# Altium PCB PCB1.pcbdoc
Units mil, origin at the board's own origin, x right, y up, seen from the top; angles counter-clockwise.
Board outline 8775.19 x 3933.2 mil, 6 copper layers (Top Layer, Inner1, Inner2, Inner3, Inner4, Bottom Layer); 113 components, 65 nets, 374 pads, 254 vias.
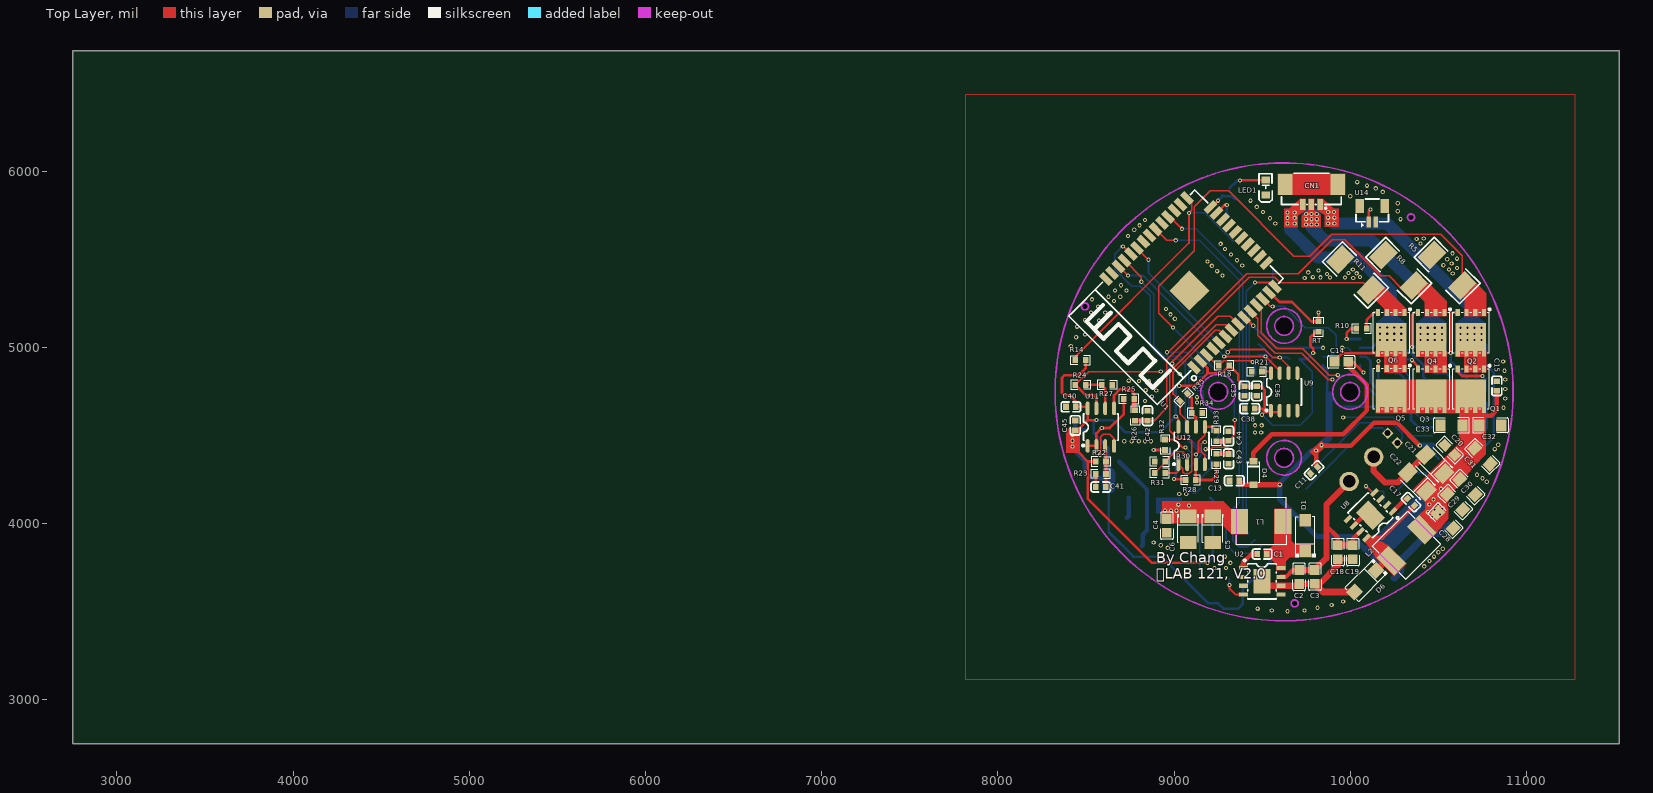
[diagram p0: Top Layer view]
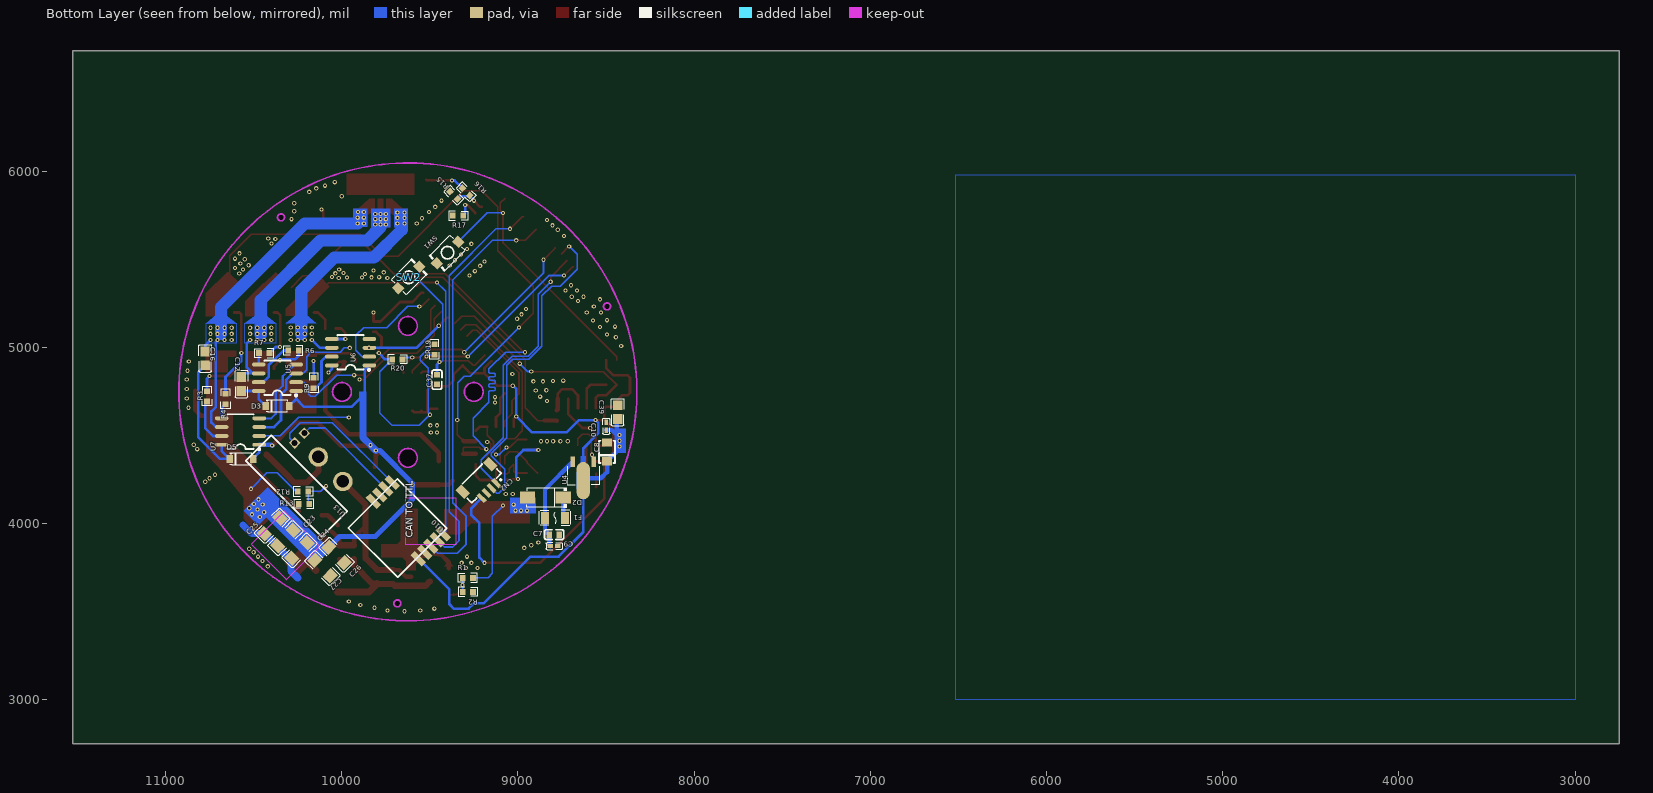
[diagram p1: Bottom Layer view, seen from below]
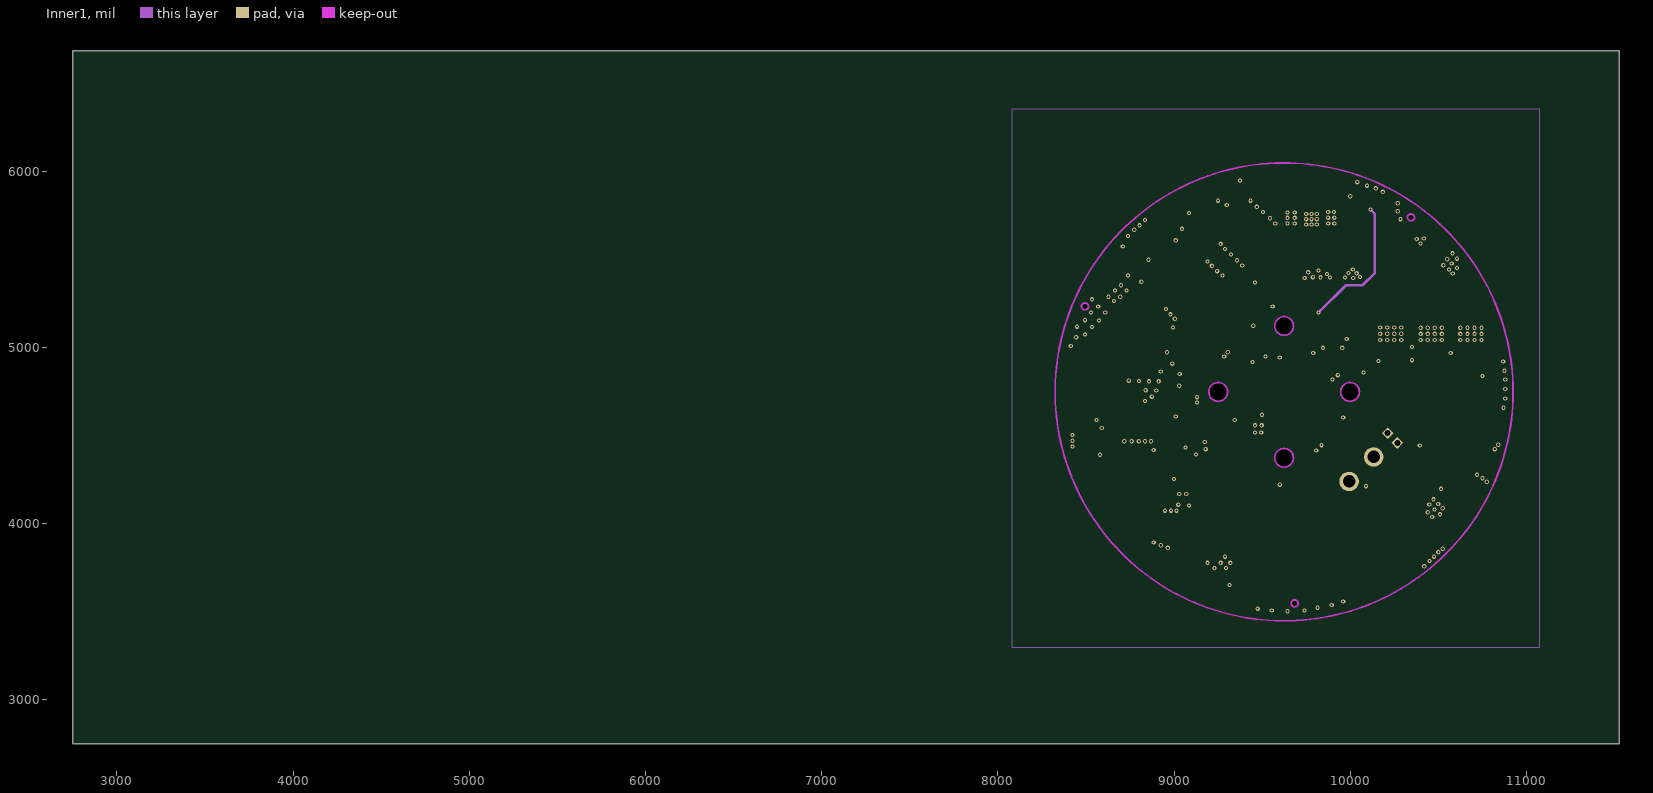
[diagram p2: Inner1]
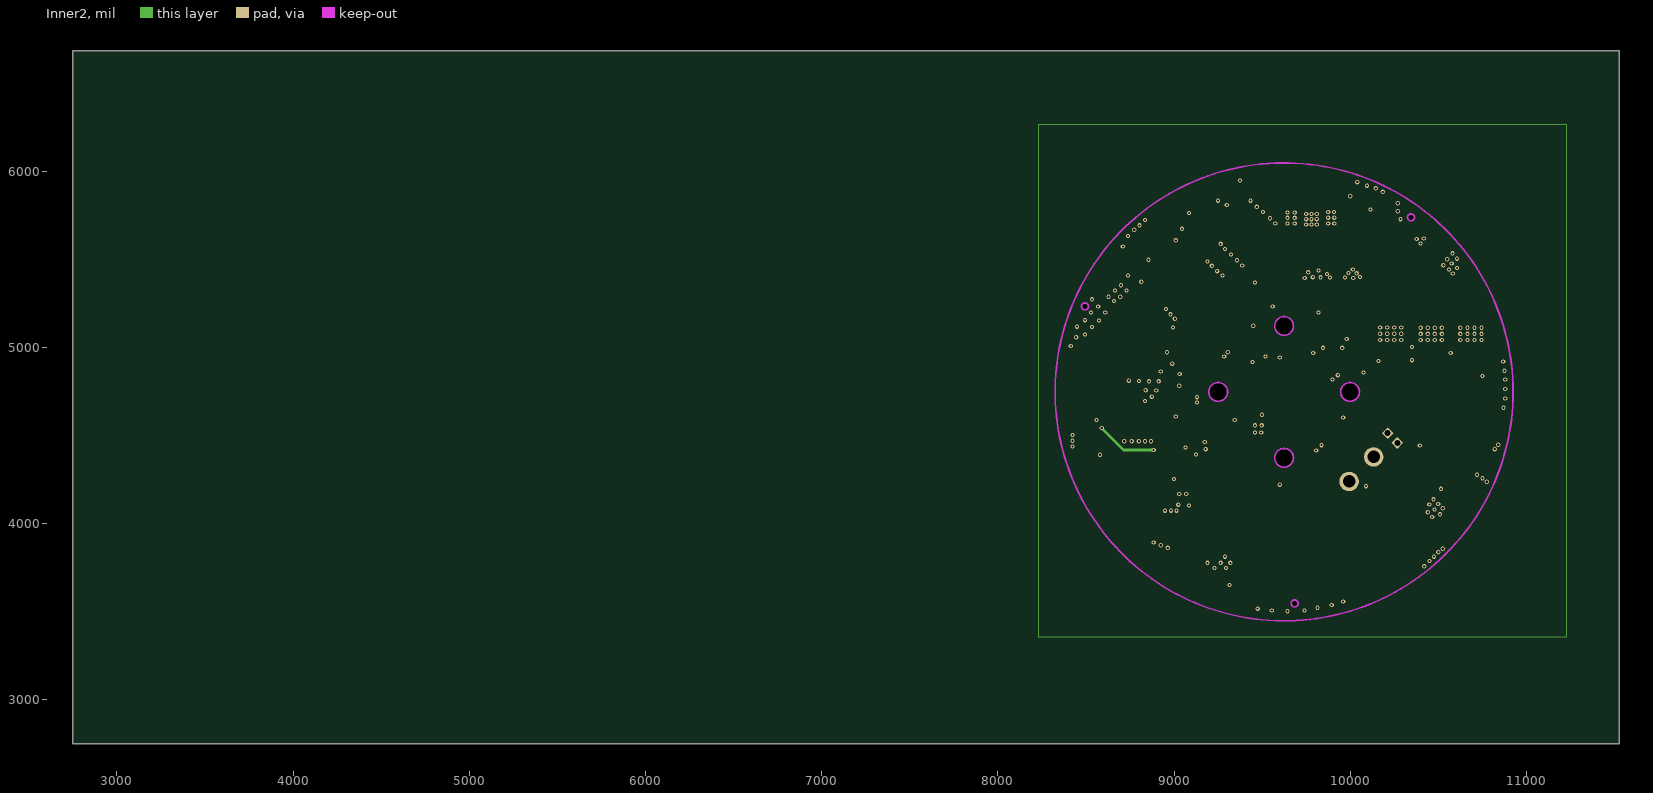
[diagram p3: Inner2]
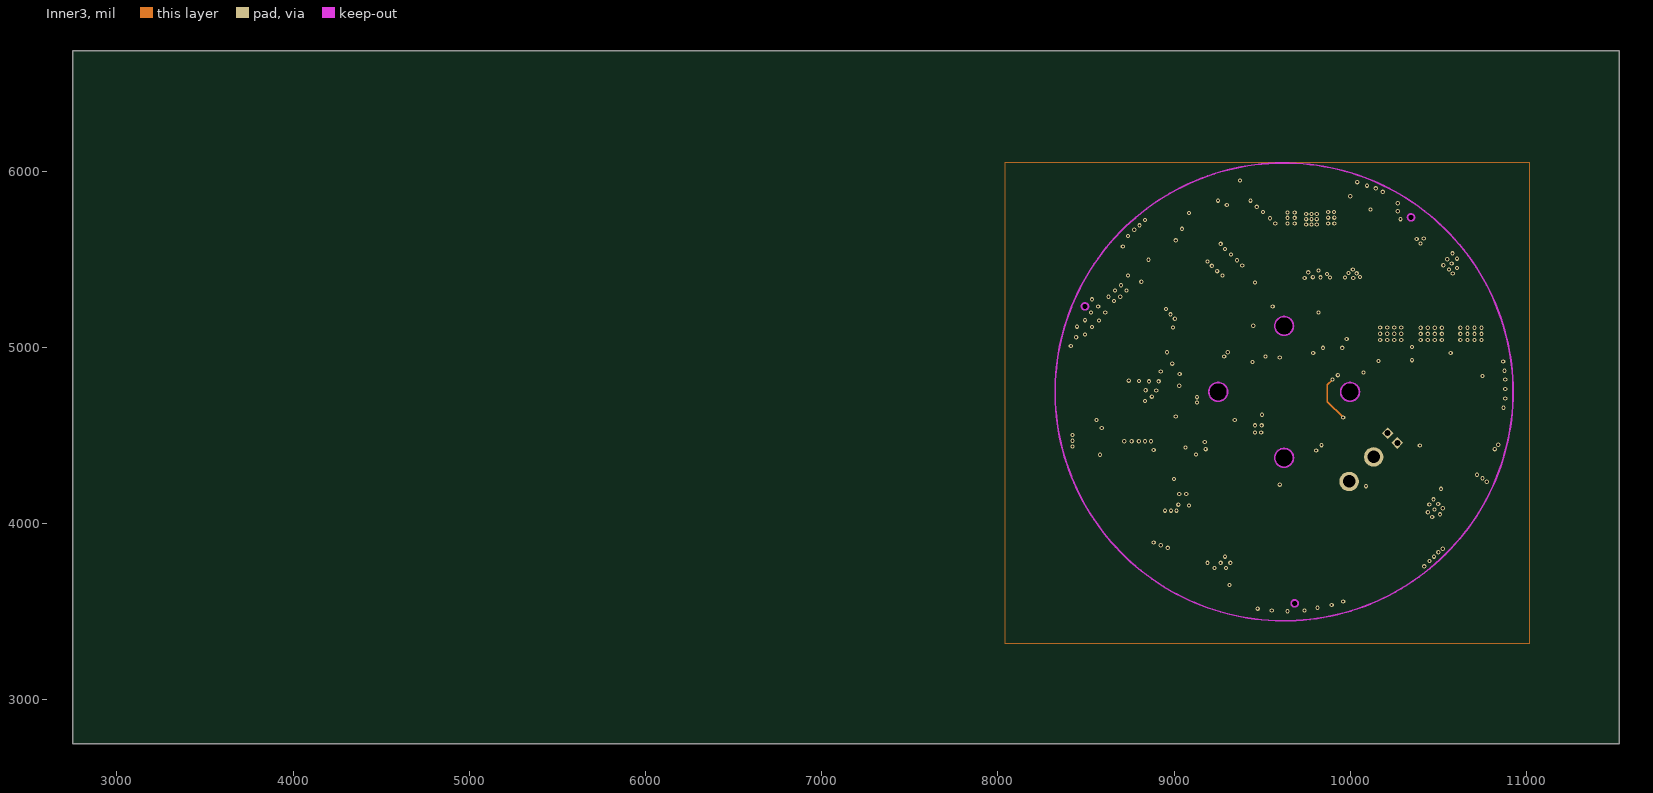
[diagram p4: Inner3]
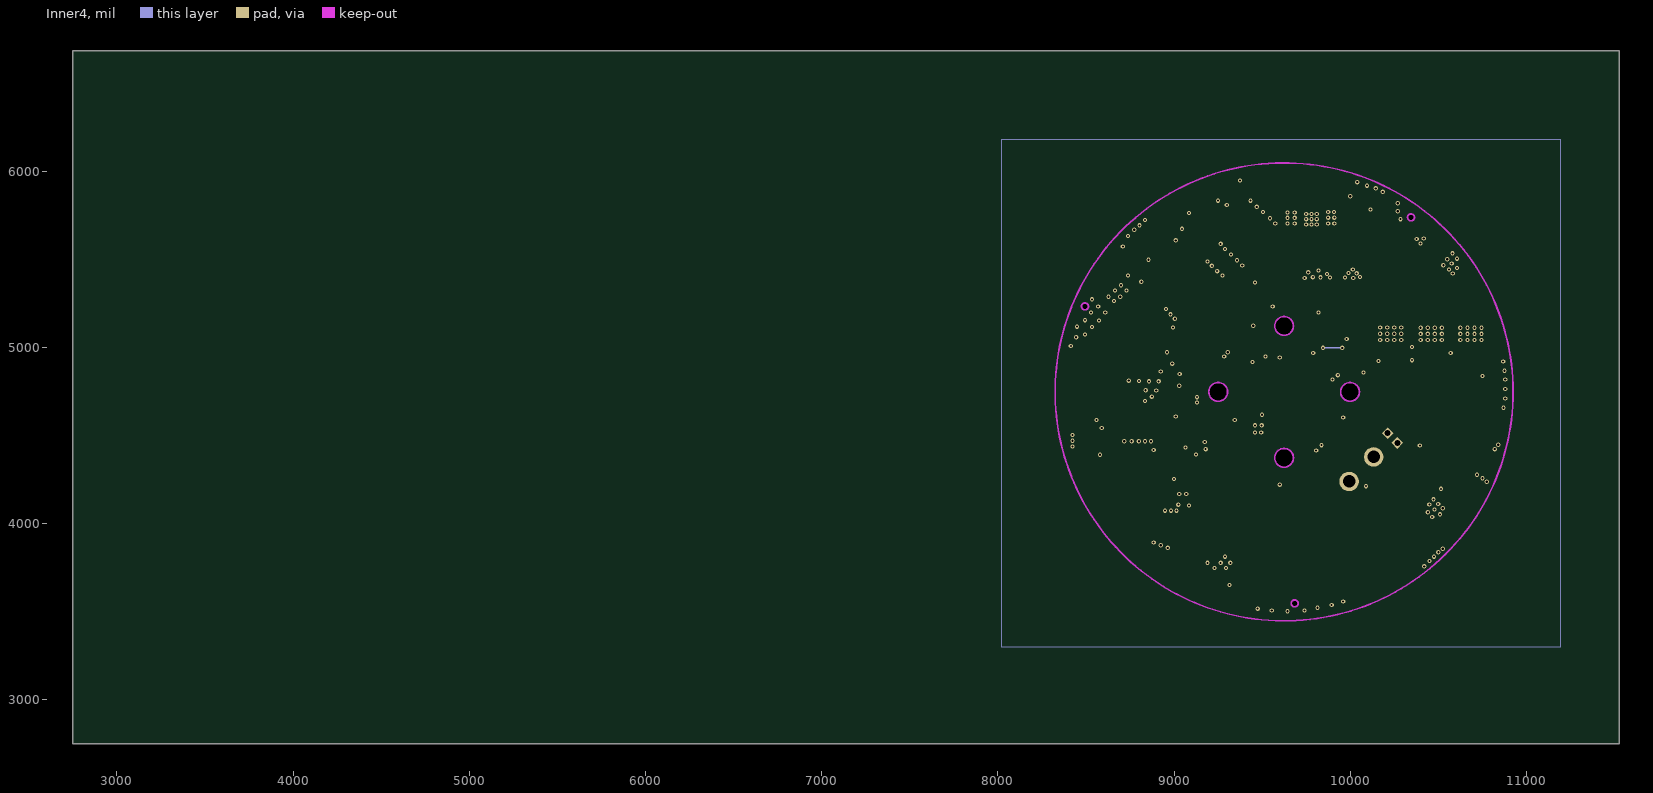
[diagram p5: Inner4]

## Layer stack, top to bottom
Top Layer: signal copper (thickness not stored)
Dielectric: dielectric 12.6, FR-4, Dk 4.8
Inner1: signal copper (thickness not stored)
Dielectric: dielectric 12.6, FR-4, Dk 4.8
Inner2: signal copper (thickness not stored)
Dielectric: dielectric 12.6, FR-4, Dk 4.8
Inner3: signal copper (thickness not stored)
Dielectric: dielectric 12.6, FR-4, Dk 4.8
Inner4: signal copper (thickness not stored)
Dielectric: dielectric 12.6, FR-4, Dk 4.8
Bottom Layer: signal copper (thickness not stored)

## Board outline
11525.19,2750 2750,2750 2750,6683.2 11525.19,6683.2
cut-out: 9676.57,5121.5 ccw(c9623.42,5121.5) 9570.27,5121.5 ccw(c9623.42,5121.5)
cut-out: 10050.59,4747.49 ccw(c9997.44,4747.34) 9944.29,4747.49 ccw(c9997.44,4747.63)
cut-out: 9676.57,4373.47 ccw(c9623.42,4373.47) 9570.27,4373.47 ccw(c9623.42,4373.47)
cut-out: 9302.56,4747.49 ccw(c9249.41,4747.34) 9196.26,4747.49 ccw(c9249.41,4747.63)
cut-out: 10363.11,5737.49 ccw(c10343.42,5737.35) 10323.74,5737.49 ccw(c10343.42,5737.62)
cut-out: 9703.11,3547.49 ccw(c9683.42,3547.35) 9663.74,3547.49 ccw(c9683.42,3547.62)
cut-out: 8513.11,5232.49 ccw(c8493.42,5232.35) 8473.74,5232.49 ccw(c8493.42,5232.62)

## Components (designator, comment, footprint, x,y, rotation, side; value= is the part's Value field where it differs from the comment)
C1 "CC0603KRX7R9BB103" C0603 9498.42,3827.49 r180 top
C2 "GRM21BR61H106KE43L" C0805 9708.42,3697.49 r90 top
C3 "GRM21BR61H106KE43L" C0805 9797.79,3698.12 r90 top
C4 "GRM21BR61H106KE43L" C0805 8958.42,3987.49 r90 top
C5 "CA45-B-16V-47uF-K" CAP-SMD_L3.5-W2.8-R-RD 9218.42,3967.49 r90 top
C6 "CA45-B-16V-47uF-K" CAP-SMD_L3.5-W2.8-R-RD 9078.42,3967.49 r90 top
C7 "CL10A226MO7JZNC" C0603 8793.42,3937.49 r180 bottom
C8 "CA45-A-16V-22uF-K" CAP-SMD_L3.2-W1.6 8493.42,4407.49 r90 bottom
C9 "CL05B104KB54PNC" C0402 8793.42,3872.49 r0 bottom
C10 "CL05B104KB54PNC" C0402 8498.42,4552.49 r270 bottom
C11 "0603B104K500NT" C0603 9793.42,4302.49 r45 top
C12 "GRM21BR61H106KE43L" C0805 10568.42,4792.49 r270 bottom
C13 "0603B104K500NT" C0603 9341.02,4243.51 r0 top
C14 "GRM21BR61H106KE43L" C0805 9948.42,4917.49 r0 top
C15 "0603B104K500NT" C0603 10830.38,4781.18 r270 top
C16 "GRM21BR61H106KE43L" C0805 10773.42,4937.49 r270 bottom
C17 "CC0603KRX7R9BB103" C0603 10343.42,4122.49 r135 top
C18 "GRM21BR61H106KE43L" C0805 9928.42,3837.49 r90 top
C19 "GRM21BR61H106KE43L" C0805 10013.42,3837.49 r90 top
C20 "GRM21BR61H106KE43L" C0805 10563.42,4417.49 r315 top
C21 "CA45-B-16V-47uF-K" CAP-SMD_L3.5-W2.8-R-RD 10478.42,4337.49 r315 top
C22 "CA45-B-16V-47uF-K" CAP-SMD_L3.5-W2.8-R-RD 10378.42,4237.49 r315 top
C23 "CL31A226KAHNNNE" C1206 10318.42,3917.49 r135 bottom
C24 "CL31A226KAHNNNE" C1206 10238.42,3847.49 r135 bottom
C25 "CL31A226KAHNNNE" C1206 10393.42,3987.49 r135 bottom
C26 "CL31A226KAHNNNE" C1206 10028.42,3822.49 r45 bottom
C27 "CL31A226KAHNNNE" C1206 10108.42,3747.49 r45 bottom
C28 "CL31A226KAHNNNE" C1206 10538.42,4017.49 r135 top
C29 "CL31A226KAHNNNE" C1206 10593.42,4122.49 r135 top
C30 "CL31A226KAHNNNE" C1206 10663.42,4207.49 r135 top
C31 "CL31A226KAHNNNE" C1206 10748.42,4382.49 r135 top
C32 "CL31A226KAHNNNE" C1206 10793.42,4557.49 r180 top
C33 "CL31A226KAHNNNE" C1206 10573.42,4557.49 r0 top
C35 "0603B104K500NT" C0603 9398.42,4752.49 r270 top
C36 "0603B104K500NT" C0603 9468.42,4752.49 r270 top
C37 "0603B104K500NT" C0603 9458.42,4817.49 r90 bottom
C38 "CC0603KRX7R9BB104" C0603 9428.42,4652.49 r0 top
C39 "GRM21BR61H106KE43L" C0805 8433.42,4632.49 r270 bottom
C40 "0603B104K500NT" C0603 8413.3,4662.49 r180 top
C41 "0603B104K500NT" C0603 8583.42,4207.49 r0 top
C42 "0603B222K500NT" C0603 8848.42,4612.49 r90 top
C43 "0603B222K500NT" C0603 9308.42,4367.49 r270 top
C44 "0603B222K500NT" C0603 9308.42,4497.49 r90 top
C45 "0603B104K500NT" C0603 8438.42,4557.49 r90 top
CN1 "YTC-A1251-03ABW" CONN-SMD_3P-P1.25_YTC-A1251-03ABW 9778.42,5867.49 r180 top
CN2 "YTC-A1001LF-04A" CONN-TH_YTC-A1001LF-04A 9198.42,4222.49 r315 bottom
D1 "B340A-13-F" SMA_L4.4-W2.6-LS5.0-RD 9743.42,3932.49 r90 top
D2 "SS14_C2480" SMA_L4.2-W2.6-LS5.3-RD 8843.42,4147.49 r0 bottom
D3 "FR107_C511885" SOD-123_L2.8-W1.8-LS3.7-RD 10363.42,4667.49 r180 bottom
D4 "FR107_C511885" SOD-123_L2.8-W1.8-LS3.7-RD 9448.42,4287.49 r270 top
D5 "FR107_C511885" SOD-123_L2.8-W1.8-LS3.7-RD 10568.42,4367.49 r180 bottom
D6 "B340A-13-F" SMA_L4.4-W2.6-LS5.0-RD 10083.42,3672.49 r225 top
F1 "BSMD1206-100-24V" F1206 8788.42,4032.49 r0 bottom
L1 "FXL0630-220-M" IND-SMD_L7.0-W6.6_FXL0630 9493.42,4012.49 r180 top
L2 "FXL0630-220-M" IND-SMD_L7.0-W6.6_FXL0630 10318.42,3877.49 r45 top
LED1 "XL-2012UGC" LED0805-RD_GREEN 9518.42,5907.49 r90 top
Q1 "HYG025N06LS1C2" DFN-8_L5.9-W5.2-P1.27-LS6.2-BL 10683.38,4762.78 r180 top
Q2 "HYG025N06LS1C2" DFN-8_L5.9-W5.2-P1.27-LS6.2-BL 10683.38,5082.78 r180 top
Q3 "HYG025N06LS1C2" DFN-8_L5.9-W5.2-P1.27-LS6.2-BL 10458.38,4762.78 r180 top
Q4 "HYG025N06LS1C2" DFN-8_L5.9-W5.2-P1.27-LS6.2-BL 10458.38,5082.78 r180 top
Q5 "HYG025N06LS1C2" DFN-8_L5.9-W5.2-P1.27-LS6.2-BL 10230.96,4764.1 r180 top
Q6 "HYG025N06LS1C2" DFN-8_L5.9-W5.2-P1.27-LS6.2-BL 10230.96,5082.62 r180 top
R1 "0603WAF2002T5E" R0603 9283.42,3692.49 r180 bottom
R2 "Res_0603" R0603 9283.42,3612.49 r0 bottom
R3 "0603WAF220JT5E" R0603 10763.42,4722.49 r90 bottom
R4 "0603WAF220JT5E" R0603 10658.42,4707.49 r90 bottom
R5 "RLP25FEGMR005" RES-SMD_L6.4-W3.2-1 10548.42,5437.49 r315 top
R6 "0603WAF220JT5E" R0603 10273.42,4982.49 r180 bottom
R7 "0603WAF220JT5E" R0603 10438.42,4967.49 r180 bottom
R8 "RLP25FEGMR005" RES-SMD_L6.4-W3.2-1 10273.42,5437.49 r315 top
R9 "0603WAF220JT5E" R0603 10158.42,4797.49 r90 bottom
R10 "0603WAF220JT5E" R0603 10063.42,5107.49 r0 top
R11 "RLP25FEGMR005" RES-SMD_L6.4-W3.2-1 10028.42,5412.49 r315 top
R12 "0603WAF2002T5E" R0603 10218.42,4182.49 r0 bottom
R13 "Res_0603" R0603 10213.42,4112.49 r180 bottom
R14 "0603WAF1002T5E" R0603 8468.42,4927.49 r0 top
R15 "0603WAF1002T5E" R0603 9363.42,5862.49 r45 bottom
R16 "0603WAF3301T5E" R0603 9293.42,5882.49 r45 bottom
R17 "0603WAF1002T5E" R0603 9338.42,5747.49 r0 bottom
R18 "0603WAF1002T5E" R0603 9283.36,4897.57 r0 top
R19 "0603WAF4701T5E" R0603 9473.76,4987.83 r90 bottom
R20 "0603WAF4701T5E" R0603 9683.42,4932.49 r0 bottom
R21 "0603WAF1002T5E" R0603 9468.42,4862.49 r0 top
R22 "0603WAF2002T5E" R0603 8583.42,4352.49 r180 top
R23 "0603WAF2002T5E" R0603 8583.42,4282.49 r0 top
R24 "0603WAF2002T5E" R0603 8468.42,4787.49 r180 top
R25 "0603WAF2002T5E" R0603 8743.42,4707.49 r0 top
R26 "0603WAF2001T5E" R0603 8778.42,4612.49 r90 top
R27 "0603WAF2001T5E" R0603 8618.42,4787.49 r180 top
R28 "0603WAF2002T5E" R0603 9093.42,4247.49 r0 top
R29 "0603WAF2001T5E" R0603 9238.42,4367.49 r270 top
R30 "0603WAF2001T5E" R0603 8918.42,4352.49 r0 top
R31 "0603WAF2002T5E" R0603 8918.42,4287.49 r0 top
R32 "0603WAF2002T5E" R0603 8948.42,4447.49 r90 top
R33 "0603WAF2001T5E" R0603 9238.42,4497.49 r90 top
R34 "0603WAF2001T5E" R0603 9128.42,4627.49 r180 top
R35 "0603WAF2002T5E" R0603 9053.42,4717.49 r225 top
RT "Res_0603" R0603 9818.42,5117.49 r270 top
SW1 "TS-1088-AR02016" SW-SMD_L3.9-W3.0-P4.45 9398.42,5537.49 r315 bottom
SW2 "TS-1088-AR02016" SW-SMD_L3.9-W3.0-P4.45 9618.42,5397.49 r135 bottom
U1 "ESP32-WROOM-32-N4" WIFIM-SMD_ESP32-WROOM-32-N4 9113.42,5387.49 r135 top
U2 "TPS5430DDAR" ESOP-8_L4.9-W3.9-P1.27-LS6.0-TL-EP 9498.42,3672.49 r0 top
U4 "CJA1117B-3.3" SOT-89-3_L4.5-W2.5-P1.50-LS4.2-BR 8628.42,4297.49 r90 bottom
U5 "EG2104S" SOIC-8_L5.0-W4.0-P1.27-LS6.0-BL 10363.42,4827.49 r90 bottom
U6 "EG2104S" SOIC-8_L5.0-W4.0-P1.27-LS6.0-BL 9948.42,4972.49 r90 bottom
U7 "EG2104S" SOIC-8_L5.0-W4.0-P1.27-LS6.0-BL 10573.42,4522.49 r90 bottom
U8 "TPS5430DDAR" ESOP-8_L4.9-W3.9-P1.27-LS6.0-TL-EP 10113.42,4047.49 r225 top
U9 "AS5600-ASOT" SOIC-8_L5.0-W4.0-P1.27-LS6.0-BL 9623.42,4747.49 r0 top
U10 "CAN-Niren-V2" CAN-Niren-V2 9638.42,4017.49 r45 bottom
U11 "LM358DR" SOIC-8_L5.0-W4.0-P1.27-LS6.0-BL 8583.42,4547.49 r0 top
U12 "LM358DR" SOIC-8_L5.0-W4.0-P1.27-LS6.0-BL 9098.42,4442.49 r0 top
U13 "XT30PB(2+2)-M" XT30PB(2+2)-M 9992.35,4239 r45 bottom
U14 "XY-SH1.0-2A51" CONN-SMD_2P-P1.00_XY-SH1.0-2A51 10123.42,5757.49 r0 top

## Footprints (in the part's own frame and the unit in brackets; to place one, negate y for a bottom-side part, rotate by r counter-clockwise, add the part's x,y. Pads: shape width x height; smd on the part's side, far side on the other; paste and mask are expansions set on the pad)
C0402 [mm]
  rect 0.79x0.54 smd: 1(-0.545,0) 2(0.545,0)
  silkscreen extent -1.17,-0.5 1.17,0.5
C0603 [mm]
  rect 0.8x0.9 smd: 1(-0.7,0) 2(0.7,0)
  silkscreen extent -1.41,-0.71 1.39,0.72
C0805 [mm]
  rect 1.41x1.35 smd: 1(-1,0) 2(1,0)
  silkscreen extent -1.96,-0.9 1.96,0.9
C1206 [mm]
  rect 1.485x1.728 smd: 1(-1.593,0) 2(1.593,0)
  silkscreen extent -2.56,-1.09 2.56,1.09
CAN-Niren-V2 [mil]
  rect 90x35 smd: 1(-205.35,100.02) 2(-205.35,49.99) 3(-205.35,-0.01) 4(-205.35,-50.02) 5(-205.33,-99.99) 6(205.35,-100.02) 7(205.35,-50.02) 8(205.35,-0.01) 9(205.35,49.99)
  silkscreen extent -197,-135 198,258
CAP-SMD_L3.2-W1.6 [mm]
  rect 1.2x1.4 smd: 1(-1.35,0) 2(1.35,0)
  silkscreen extent -1.6,-1.14 1.6,1.14
CAP-SMD_L3.5-W2.8-R-RD [mm]
  rect 1.9x2.376 smd: 1(1.899,0) 2(-1.899,0)
  silkscreen extent -1.83,-1.55 2.21,1.55
CONN-SMD_2P-P1.00_XY-SH1.0-2A51 [mm]
  rect 0.6x1.6 smd: 1(-0.5,-1.15) 2(0.5,-1.15)
  rect 1.2x2 smd: 3(1.8,1.15) 4(-1.8,1.15)
  silkscreen extent -2.35,-1.91 2.35,2.15
CONN-SMD_3P-P1.25_YTC-A1251-03ABW [mm]
  rect 0.8x1.6 smd: 1(-1.25,1.45) 2(0,1.45) 3(1.25,1.45)
  rect 2.1x3 smd: 4(-3.8,-1.45) 5(3.8,-1.45)
  silkscreen extent -4.3,-3.05 4.3,2.08
CONN-TH_YTC-A1001LF-04A [mm]
  rect 0.6x1.55 smd: 1(-1.5,1.262) 2(-0.5,1.262) 3(0.5,1.262) 4(1.5,1.262)
  rect 1.2x1.8 smd: 5(2.8,-1.263) 6(-2.8,-1.263)
  silkscreen extent -3,-2.14 3,1.46
DFN-8_L5.9-W5.2-P1.27-LS6.2-BL [mm]
  rect 0.6x1 smd: 1(-1.905,-2.925) 2(-0.635,-2.925) 3(0.635,-2.925) 4(1.905,-2.925) 5(1.905,2.925) 6(0.635,2.925) 7(-0.635,2.925) 8(-1.905,2.925)
  rect 4.41x4 smd: 9(0,0.61)
  silkscreen extent -2.85,-3.53 2.6,2.92
ESOP-8_L4.9-W3.9-P1.27-LS6.0-TL-EP [mm]
  rect 1.3x0.6 smd: 1(-2.7,1.905) 2(-2.7,0.635) 3(-2.7,-0.635) 4(-2.7,-1.905) 5(2.7,-1.905) 6(2.7,-0.635) 7(2.7,0.635) 8(2.7,1.905)
  rect 2.5x3.5 smd: 9(0,0)
  silkscreen extent -2.67,-2.55 2.05,3.2
F1206 [mm]
  rect 1.19x1.728 smd: 1(-1.445,0) 2(1.445,0)
  silkscreen extent -2.27,-1.09 2.27,1.09
IND-SMD_L7.0-W6.6_FXL0630 [mm]
  rect 2.424x3.62 smd: 1(3.128,0) 2(-3.128,0)
  silkscreen extent -3.58,-3.38 3.58,3.38
LED0805-RD_GREEN [mm]
  rect 1x1.25 smd: 1(-1.1,0) 2(1.1,0)
  silkscreen extent -2.1,-0.95 1.98,0.96
R0603 [mil]
  rect 31.75x34.02 smd: 1(-29.66,0) 2(29.66,0)
  silkscreen extent -55,-26 55,26
RES-SMD_L6.4-W3.2-1 [mm]
  rect 2.5x3.4 smd: 1(-3.1,0) 2(3.1,0)
  silkscreen extent -4.69,-2.16 4.69,2.03
SMA_L4.2-W2.6-LS5.3-RD [mm]
  rect 2.2x1.7 smd: 1(-2.565,0) 2(2.565,0)
  silkscreen extent -3.08,-1.44 2.7,1.44
SMA_L4.4-W2.6-LS5.0-RD [mm]
  rect 1.8x1.7 smd: 1(-2.192,0) 2(2.192,0)
  silkscreen extent -3.11,-1.48 2.73,1.48
SOD-123_L2.8-W1.8-LS3.7-RD [mm]
  rect 0.95x1.15 smd: 1(-1.692,0) 2(1.692,0)
  silkscreen extent -1.58,-0.87 1.41,0.87
SOIC-8_L5.0-W4.0-P1.27-LS6.0-BL [mil]
  oval 22.38x76.78 smd: 1(-75,-106.5) 2(-25,-106.5) 3(25,-106.5) 4(75,-106.5) 5(75,106.5) 6(25,106.5) 7(-25,106.5) 8(-75,106.5)
  silkscreen extent -106,-111 98,75
SOT-89-3_L4.5-W2.5-P1.50-LS4.2-BR [mm]
  rect 1.575x0.672 smd: 1(1.356,-1.5) 3(1.356,1.5)
  oval 5.377x1.9 smd: 2(-1.356,0)
  Top Layer region: -2.283,0.95 -0.429,0.95 -0.384,0.949 -0.34,0.946 -0.296,0.94 -0.252,0.933 -0.208,0.924 -0.165,0.912 -0.123,0.899 -0.081,0.884 -0.04,0.866 0,0.847 0.04,0.826 0.078,0.803 0.115,0.779 0.151,0.752 0.185,0.724 0.219,0.695 0.251,0.664 0.281,0.631 0.31,0.597 0.337,0.562 0.362,0.525 0.386,0.488 0.408,0.449 0.428,0.409 0.447,0.33 2.144,0.33 2.144,-0.33 0.447,-0.33 0.428,-0.409 0.408,-0.449 0.386,-0.488 0.362,-0.526 0.337,-0.562 0.31,-0.597 0.281,-0.631 0.251,-0.664 0.219,-0.695 0.185,-0.725 0.151,-0.753 0.115,-0.779 0.078,-0.804 0.04,-0.827 0,-0.848 -0.04,-0.867 -0.081,-0.884 -0.123,-0.899 -0.165,-0.913 -0.208,-0.924 -0.252,-0.934 -0.296,-0.941 -0.34,-0.946 -0.384,-0.949 -0.429,-0.95 -2.283,-0.95 -2.328,-0.949 -2.372,-0.946 -2.416,-0.941 -2.46,-0.934 -2.504,-0.924 -2.547,-0.913 -2.589,-0.899 -2.631,-0.884 -2.672,-0.867 -2.713,-0.848 -2.752,-0.827 -2.79,-0.804 -2.827,-0.779 -2.863,-0.753 -2.898,-0.725 -2.931,-0.695 -2.963,-0.664 -2.993,-0.631 -3.022,-0.597 -3.049,-0.562 -3.075,-0.526 -3.098,-0.488 -3.12,-0.449 -3.141,-0.409 -3.159,-0.369 -3.175,-0.327 -3.189,-0.285 -3.202,-0.242 -3.212,-0.199 -3.22,-0.155 -3.227,-0.111 -3.231,-0.067 -3.233,-0.022 -3.233,0.022 -3.231,0.067 -3.227,0.111 -3.22,0.155 -3.212,0.199 -3.202,0.242 -3.189,0.285 -3.175,0.327 -3.159,0.369 -3.141,0.409 -3.12,0.449 -3.098,0.488 -3.075,0.525 -3.049,0.562 -3.022,0.597 -2.993,0.631 -2.963,0.664 -2.931,0.695 -2.898,0.724 -2.863,0.752 -2.827,0.779 -2.79,0.803 -2.752,0.826 -2.713,0.847 -2.672,0.866 -2.631,0.884 -2.589,0.899 -2.547,0.912 -2.504,0.924 -2.46,0.933 -2.416,0.94 -2.372,0.946 -2.328,0.949
  silkscreen extent -1.95,-2.33 0.7,2.33
SW-SMD_L3.9-W3.0-P4.45 [mm]
  rect 1.23x1.36 smd: 1(-2.185,0) 2(2.185,0)
  silkscreen extent -2.03,-1.62 2.25,1.62
WIFIM-SMD_ESP32-WROOM-32-N4 [mm]
  rect 2x0.9 smd: 1(-9,9.005) 2(-9,7.735) 3(-9,6.465) 4(-9,5.195) 5(-9,3.925) 6(-9,2.655) 7(-9,1.385) 8(-9,0.115) 9(-9,-1.155) 10(-9,-2.425) 11(-9,-3.695) 12(-9,-4.965) 13(-9,-6.235) 14(-9,-7.505) 25(9,-7.505) 26(9,-6.235) 27(9,-4.965) 28(9,-3.695) 29(9,-2.425) 30(9,-1.155) 31(9,0.115) 32(9,1.385) 33(9,2.655) 34(9,3.925) 35(9,5.195) 36(9,6.465) 37(9,7.735) 38(9,9.005)
  rect 0.9x2 smd: 15(-5.715,-9.005) 16(-4.445,-9.005) 17(-3.175,-9.005) 18(-1.905,-9.005) 19(-0.635,-9.005) 20(0.635,-9.005) 21(1.905,-9.005) 22(3.175,-9.005) 23(4.445,-9.005) 24(5.715,-9.005)
  rect 4.1x4.1 smd: 39(-0.68,1.665)
  silkscreen extent -10.41,-9.13 9.02,16.54
XT30PB(2+2)-M [mm]
  round 2.8 hole 1.8: 1(0,0) 2(5,0)
  rect 1.2x1.2 hole 0.85: 3(8.85,1) 4(8.85,-1)
  silkscreen extent -3.5,2.6 12,7.8

## Via types
v1: diameter 24.02, hole 12.01, Top Layer to Bottom Layer, 254 vias

## Nets (pads, with @x,y where several pads share a name; then routed paths per layer and width w, separated by ;. In a path a pad name is that pad's centre, name@x,y a point inside that pad or via, vN(x,y) a via of type N, cw(c..) or ccw(c..) an arc to the next point about the centre after c; other vN are vias at no path point)
1V65: R25.1 R28.1 R32.1 U11.1 U11.2 | length 1157.2
  Top Layer w15: U11.1 U11.2 8558.42,4512.49 v1(8588.42,4542.49) 8633.42,4542.49 8713.76,4622.83 R25.1 ; v1(8883.42,4417.49) 8948.08,4417.49 R32.1 ; v1(8998.42,4252.49) 9058.76,4252.49 R28.1
  Inner2 w15: v1(8588.42,4542.49) 8713.42,4417.49 v1(8883.42,4417.49)
  Bottom Layer w15: v1(8883.42,4417.49) 8968.42,4417.49 9008.42,4377.49 9008.42,4262.49 v1(8998.42,4252.49)
3V3: C8.1 C10.2 C35.1 C36.1 C38.2 C39.2 C40.1 C45.1 CN2.4 R14.2 R18.2 R19.2 R20.2 R22.2 RT.2 U1.2 U4.2 U9.1 U9.2 U10.1 U11.8 U12.8 | length 8054.3
  Top Layer w10: v1(9498.42,4617.49) 9513.42,4632.49 9513.42,4637.49
  Top Layer w15: R14.2 8498.42,4927.15 8498.42,4882.49 8458.42,4842.49 8378.42,4842.49 8363.42,4827.49 8363.42,4742.49 8378.42,4727.49 8408.42,4727.49 8440.86,4695.05 C40.1 8499.92,4662.49 U11.8 8508.42,4587.49 ; R22.2 8508.42,4352.49 ; v1(8558.42,4587.49) 8508.42,4587.49 ; v1(9008.42,4607.49) 9023.42,4592.49 U12.8 ; v1(9028.42,4782.49) 9118.42,4782.49 9188.42,4852.49 ; U1.2 9149.31,4921.6 9188.42,4882.49 9188.42,4852.49 ; v1(9188.42,3777.49) 8873.42,3777.49 8508.42,4142.49 8508.42,4352.49 ; C38.2 9498.42,4652.49 9513.42,4637.49 ; U9.1 U9.1@9539.92,4632.49 ; U9.2 9589.92,4632.49 U9.1@9539.92,4632.49 ; v1(9788.42,4967.49) 9788.42,4992.49 9773.42,5007.49 9773.42,5057.49 9803.76,5087.83 RT.2 ; 8508.42,4352.49 8458.42,4402.49 8458.42,4537.49 8508.42,4587.49 ; 9188.42,4852.49 9267.93,4852.49 R18.2 9363.42,4847.17 9363.42,4812.49 9395.86,4780.05 C35.1 C36.1 9490.86,4780.05 9513.42,4757.49 9513.42,4637.49 ; 9513.42,4637.49 9518.42,4632.49 U9.1@9539.92,4632.49
  Bottom Layer w10: R19.2 9483.42,5017.49 9553.42,4947.49 9553.42,4927.49 9508.42,4882.49 9508.42,4627.49 v1(9498.42,4617.49) 9558.42,4557.49 9713.42,4557.49 9783.42,4627.49 9783.42,4862.15 R20.2
  Bottom Layer w15: v1(9028.42,4782.49) 9008.42,4762.49 v1(9008.42,4607.49) 8918.42,4517.49 8723.42,4517.49 8653.42,4587.49 v1(8558.42,4587.49) 8543.42,4572.49 8543.42,4512.49 8628.42,4427.49 U4.2 8628.42,3952.49 8768.42,3812.49 8928.42,3812.49 9193.42,3547.49 9248.42,3547.49 9278.42,3517.49 9363.42,3517.49 9388.42,3542.49 9388.42,3626.04 U10.1 ; v1(9188.42,3777.49) 9218.42,3807.49 9218.42,4002.49 9263.42,4047.49 9263.42,4087.19 CN2.4 ; R20.2 9753.42,4932.49 v1(9788.42,4967.49)
  Bottom Layer w25: C39.2 8438.42,4588.12 8438.42,4502.49 ; C10.2 8466.96,4531.03 8438.42,4502.49 ; U4.2 8615.02,4257.49 8528.42,4257.49 8493.42,4292.49 C8.1 8438.42,4409.34 8438.42,4502.49
  other v1: 8423.42,4438.31 8423.42,4469.99 8423.42,4502.49
5V: C4.2 C5.1 C6.1 D2.2 L1.1 R1.2 | length 530.5
  Bottom Layer w8: v1(9083.42,4102.49) 9143.42,4042.49 9143.42,3717.49 9168.42,3692.49 R1.2
  other v1: 8947.67,4073.62 8981.27,4073.62 9012.8,4073.62 9023.42,4107.49
12V: C11.2 C13.2 C15.2 C20.2 C21.1 C22.1 C23.2 C24.2 C25.2 C26.2 C27.2 C28.2 C29.2 C30.2 C31.2 C32.2 C33.2 D3.2 D4.2 D5.2 L2.1 Q1.5 Q1.6 Q1.7 Q1.8 Q1.9 Q3.5 Q3.6 Q3.7 Q3.8 Q3.9 Q5.5 Q5.6 Q5.7 Q5.8 Q5.9 R12.2 U5.1 U6.1 U7.1 | length 3774.5
  Top Layer w25: C13.2 9391.23,4220.86 D4.2 ; C11.2 9805.46,4329.43 v1(9805.46,4414.52) 9805.46,4419.52 9826.62,4440.68 10001.62,4440.68 10133.42,4572.49 10263.42,4572.49 v1(10393.42,4442.49) ; 10748.42,4612.49 10798.42,4612.49 10830.38,4644.44 C15.2
  Top Layer w30: D4.2 v1(9598.42,4220.86)
  Bottom Layer w8: R12.2@10253.42,4177.49 10363.42,4287.49 10423.42,4287.49 v1(10513.42,4197.49)
  Bottom Layer w15: U6.1 9868.42,4870.99 9868.42,4727.49 ; 9878.42,4727.49 9943.42,4662.49 10212.05,4662.49 10256.92,4707.36 ; U5.1 10256.92,4707.36 ; D3.2 10256.92,4707.36 ; U7.1 10466.92,4402.36 D5.2
  Bottom Layer w25: v1(10393.42,4442.49) 10398.42,4447.49 U7.1
  Bottom Layer w30: v1(9805.46,4414.52) 9782.7,4414.52 9598.42,4230.24 9598.42,4137.49 9808.42,3927.49 10012.1,3927.49 C26.2
  Bottom Layer w40: v1(9805.46,4414.52) v1(9835.97,4445.03) 9878.42,4487.49 9878.42,4727.49
  other v1: 10463.42,4037.49 10508.42,4052.49 10439.12,4064.44 10476.49,4079.42 10523.42,4087.49 10447.6,4108.31 10497.47,4110.79 10470.6,4137.65
$1N650: C1.2 U2.1 | length 131.6
  Top Layer w25: U2.1 9392.13,3781.19 9438.42,3827.49 C1.2
$1N722: C1.1 D1.1 L1.2 U2.8
$1N1371: R1.1 R2.2 U2.4 | length 192.6
  Top Layer w8: v1(9313.08,3651.73) 9313.08,3632.83 9348.42,3597.49 U2.4
  Bottom Layer w8: R2.2 v1(9313.08,3651.73) R1.1
$1N1971: C7.1 C9.2 F1.2 U4.3 | length 556.4
  Bottom Layer w25: U4.3 8845.31,4193.05 F1.2 8845.31,3961.82 C7.1 8820.98,3878.59 C9.2
$1N1973: D2.1 F1.1 | length 119.5
  Bottom Layer w25: F1.1 8742.42,4043.38 D2.1
$1N2491: C12.2 D3.1 U5.8 | length 200.3
  Bottom Layer w15: D3.1 10469.92,4707.36 U5.8 10567.79,4752.49 C12.2
$1N2701: C14.2 D4.1 U6.8 | length 1281.5
  Top Layer w15: C14.2@9975.98,4917.49 C14.2 10013.42,4917.49 v1(10073.42,4857.49)
  Top Layer w25: D4.1 9448.42,4402.49 9553.42,4507.49 9958.42,4507.49 10093.42,4642.49 10093.42,4787.49 9987.79,4893.12 C14.2
  Bottom Layer w15: U6.8 10054.92,4875.99 v1(10073.42,4857.49)
$1N2890: C16.2 D5.1 U7.8 | length 750.9
  Bottom Layer w15: U7.8 10679.92,4412.36 D5.1 10688.42,4367.49 10813.42,4492.49 10813.42,4858.12 C16.2
$1N3593: Q1.4 R3.2 | length 257.4
  Top Layer w15: Q1.4 10613.42,4872.89 10613.42,4857.49 10633.42,4837.49 v1(10748.42,4837.49)
  Bottom Layer w15: v1(10748.42,4837.49) 10763.42,4822.49 R3.2
$1N3664: Q2.4 R4.2 | length 531.9
  Top Layer w15: v1(10568.42,4967.49) 10568.42,5187.49 10578.87,5197.93 Q2.4
  Bottom Layer w15: v1(10568.42,4967.49) 10568.42,4922.49 10658.42,4832.49 R4.2
$1N4096: Q3.4 R6.2 | length 209.2
  Top Layer w15: v1(10348.42,4927.49) 10383.38,4892.53 Q3.4
  Bottom Layer w15: R6.2 10243.76,4952.15 10263.42,4932.49 10343.42,4932.49 v1(10348.42,4927.49)
$1N4107: Q4.4 R7.2 | length 296.2
  Top Layer w15: v1(10348.42,5002.49) 10348.42,5182.49 10363.87,5197.93 Q4.4
  Bottom Layer w15: v1(10348.42,5002.49) 10373.76,5002.49 R7.2
$1N4356: Q5.4 R9.2 | length 139.6
  Top Layer w15: Q5.4 10158.42,4881.73 v1(10158.42,4922.49)
  Bottom Layer w15: R9.2 v1(10158.42,4922.49)
$1N4367: Q6.4 R10.2 | length 129.4
  Top Layer w15: R10.2 10093.08,5157.15 10133.71,5197.77 Q6.4
$1N5511: R14.1 SW1.1 U1.25 | length 1525.9
  Top Layer w8: U1.25 9098.42,5820.34 9098.42,5777.49 v1(9083.42,5762.49)
  Top Layer w10: R14.1 8438.76,4947.83 9083.42,5592.49 v1(9083.42,5762.49)
  Bottom Layer w8: v1(9083.42,5762.49) 9173.42,5762.49 SW1.1
$1N5798: R15.1 R16.1 U1.24 | length 173.2
  Top Layer w15: U1.24 9213.21,5797.27 v1(9248.42,5832.49)
  Bottom Layer w15: v1(9248.42,5832.49) R16.1@9272.45,5856.51 ; R16.1 R16.1@9272.45,5856.51 ; R15.1 9327.45,5856.51 R16.1@9272.45,5856.51
$1N5805: LED1.2 R16.2 | length 223.6
  Top Layer w15: v1(9373.42,5947.49) 9515.11,5947.49 LED1.2
  Bottom Layer w15: R16.2 9358.42,5947.49 v1(9373.42,5947.49)
$1N5929: R17.1 U1.23 | length 141.2
  Top Layer w15: U1.23 9285.94,5807.49 v1(9298.42,5807.49)
  Bottom Layer w15: v1(9298.42,5807.49) 9298.42,5757.83 R17.1
$1N7274: R21.2 U9.8 | length 53.9
  Top Layer w10: R21.2 9539.92,4862.49 U9.8
$2N446: C17.2 U8.1 | length 112.3
  Top Layer w25: U8.1 10313.98,4141.97 C17.2
$2N447: C17.1 D6.1 L2.2 U8.8 | length 458.2
  Top Layer w25: U8.8 10179.2,3919.29 C17.1
  Top Layer w40: D6.1 10201.34,3790.41 L2.2
$2N452: R12.1 R13.2 U8.4 | length 240.1
  Top Layer w8: v1(10088.42,4212.49) 10125.23,4175.68 U8.4
  Bottom Layer w8: v1(10088.42,4212.49) 10118.42,4182.49 R12.1 R13.2@10188.76,4117.49
$2N1488: C41.2 R22.1 R23.2 U11.3 | length 236.3
  Top Layer w15: U11.3 8613.08,4436.33 R22.1 R23.2 8613.08,4209.59 C41.2
$2N1627: R25.2 R26.2 U11.5 | length 310.8
  Top Layer w15: U11.5 8658.42,4727.49 8693.42,4762.49 8748.42,4762.49 8773.08,4737.83 R25.2
  Top Layer w25: R25.2 8773.08,4647.49 R26.2
$2N1790: R24.1 R27.2 U11.6 | length 232.3
  Top Layer w15: R24.1 R27.2 8608.42,4767.83 U11.6
$2N2142: R28.2 R29.2 U12.3 | length 264.7
  Top Layer w15: R28.2 9213.42,4247.49 9238.42,4272.49 R29.2 ; R28.2@9123.08,4262.49 9123.08,4335.65 U12.3
$2N2146: R30.2 R31.1 U12.2 | length 294.5
  Top Layer w8: R30.2 9003.08,4407.49 9048.42,4407.49 9073.42,4382.49 U12.2
  Top Layer w10: R31.1 8948.08,4346.81 R30.2
$2N2347: R32.2 R33.2 U12.5 | length 461.3
  Top Layer w10: R32.2 9001.04,4477.15 9045.7,4432.49 v1(9063.42,4432.49) ; v1(9123.42,4392.49) 9138.42,4407.49 9138.42,4467.49 9173.42,4502.49 U12.5
  Top Layer w15: U12.5 9216.58,4548.99 R33.2
  Bottom Layer w10: v1(9063.42,4432.49) 9103.42,4392.49 v1(9123.42,4392.49)
$2N2351: R34.2 R35.1 U12.6 | length 209.8
  Top Layer w15: R35.1 9098.76,4714.09 R34.2 9123.42,4602.83 U12.6
CAN_H: U10.6 U13.3 | length 811.9
  Bottom Layer w10: U10.6 10051.98,4572.49 10233.42,4572.49 10293.42,4512.49 10293.42,4484.4 U13.3
CAN_L: U10.7 U13.4 | length 617.4
  Bottom Layer w10: U10.7 10092.69,4542.49 10181.61,4542.49 U13.4
EN_MOS: U1.9 U5.3 U6.3 U7.3 | length 1496.3
  Top Layer w8: v1(9953.42,4997.49) v1@9958.42,5002.49
  Top Layer w15: U1.9 9401.82,5169.09 v1(9448.42,5122.49)
  Inner4 w10: v1(9843.42,4997.49) v1(9953.42,4997.49)
  Bottom Layer w8: v1(9953.42,4997.49) 9983.42,4997.49 10008.42,4972.49 10173.42,4972.49 10198.42,4947.49 10198.42,4872.49 10218.42,4852.49 U5.3
  Bottom Layer w15: v1(9448.42,5122.49) 9573.42,4997.49 U6.3 v1(9843.42,4997.49) ; U5.3 10278.14,4852.49 10313.42,4817.2 10313.42,4762.49 10343.42,4732.49 10343.42,4587.49 10383.42,4547.49 U7.3
GH_A: R3.1 U7.7 | length 266.6
  Bottom Layer w15: U7.7 10728.42,4497.49 10773.42,4542.49 10773.42,4682.83 R3.1
GH_B: R6.1 U5.7 | length 280.1
  Bottom Layer w15: R6.1 10328.42,4982.49 10357.93,4952.98 10358.98,4952.98 10413.42,4898.54 10413.42,4832.49 10443.42,4802.49 U5.7
GH_C: R9.1 U6.7 | length 248.2
  Bottom Layer w15: U6.7 10088.42,4947.49 10113.42,4922.49 10113.42,4802.49 10148.08,4767.83 R9.1
GL_A: R4.1 U7.5 | length 89.2
  Bottom Layer w15: R4.1 10679.92,4656.33 U7.5
GL_B: R7.1 U5.5 | length 65.8
  Bottom Layer w15: R7.1 10469.92,4965.65 U5.5
GL_C: R10.1 U6.5 | length 177.2
  Top Layer w15: v1(9978.42,5047.49) 9978.42,5082.49 10003.42,5107.49 R10.1
  Bottom Layer w15: v1(9978.42,5047.49) U6.5
GND: C2.1 C3.1 C4.1 C5.2 C6.2 C7.2 C8.2 C9.1 C10.1 C11.1 C13.1 C15.1 C18.1 C19.1 C20.1 C21.2 C22.2 C23.1 C24.1 C25.1 C26.1 C27.1 C28.1 C29.1 C30.1 C31.1 C32.1 C33.1 C35.2 C36.2 C37.1 C38.1 C39.1 C40.2 C41.1 C42.2 C43.2 C44.2 C45.2 CN2.3 D1.2 D6.2 LED1.1 R2.1 R5.1 R8.1 R11.1 R13.1 R15.2 R17.2 R21.1 R23.1 R27.1 R30.1 R34.1 SW1.2 SW2.1 U1.1 U1.15 U1.38 U1.39 U2.6 U2.9 U4.1 U5.4 U6.4 U7.4 U8.6 U8.9 U9.4 U10.2 U10.8 U11.4 U12.4 U13.2 U14.2 | length 2816.1
  Top Layer w8: v1(8579.23,4390.44) 8583.42,4394.63 8583.42,4492.49 8598.42,4507.49 8633.42,4507.49 8658.42,4482.49 U11.4 ; U12.4 9173.42,4387.49 9153.42,4407.49 9153.42,4452.49 9163.42,4462.49 v1(9173.42,4462.49)
  Top Layer w15: R23.1 8553.76,4209.59 C41.1
  Top Layer w25: C18.1@9925.43,3798.32 10013.85,3798.32 C19.1@10014.33,3797.84 ; U8.6 10078.07,4047.48 U8.9
  Top Layer w35: U2.9 9523.43,3647.49 U2.6 9697.79,3647.49 C2.1 9797.16,3658.12 C3.1 9824.68,3658.75 9928.42,3762.49 C18.1 ; U13.2 10131.54,4297.76 10196.81,4232.49 10267.71,4232.49 C22.2 C21.2
  Top Layer w40: C3.1 9845.09,3611.45 D6.2
  Bottom Layer w12: U5.4 10266.9,4902.49 10333.42,4835.96 10333.42,4782.49 10373.42,4742.49 10373.42,4622.49 10398.42,4597.49 U7.4
  Bottom Layer w40: 10248.42,3692.49 10287.76,3731.82 10287.76,3803.15 10297.76,3803.15 C25.1 10509.09,3943.15 10558.42,3992.49
  other v1: 9643.42,3502.49 9553.42,3507.49 9738.42,3507.49 9473.42,3517.49 9813.42,3522.49 9893.42,3537.49 9958.42,3557.49 9228.42,3747.49 9293.42,3747.49 10418.42,3757.49 9263.42,3777.49 9318.42,3777.49 10448.42,3787.49 9288.42,3812.49 10473.42,3812.49 10498.42,3837.49 10523.42,3857.49 8963.42,3862.49 8923.42,3877.49 8883.42,3892.49 9028.42,4167.49 9068.21,4167.49 10773.42,4237.49 10748.42,4257.49 10718.42,4277.49 10818.42,4422.49 10838.42,4447.49 8716.28,4467.49 8758.42,4467.49 8799.16,4467.49 8834.61,4467.49 8868.42,4467.49 9458.42,4517.49 9493.29,4517.49 9458.42,4557.49 9496.17,4557.49 10868.42,4657.49 9128.47,4687.03 8833.52,4695.47 10878.42,4709.3 9128.47,4717.49 8872.89,4720.23 8837.97,4756.42 8897.65,4755.79 10878.42,4763.91 8856.38,4807.22 8911.62,4807.22 8799.87,4809.12 8742.09,4811.03 10878.42,4817.49 9030.75,4848.29 10873.42,4867.49 10866.22,4919.18 8413.42,5007.49 8443.42,5057.49 8493.42,5072.49 8533.85,5114.97 8448.42,5117.49 8573.42,5152.49 8494.32,5154.5 9003.42,5162.49 8978.42,5187.49 8528.42,5197.49 8608.42,5197.49 8953.42,5217.49 8568.42,5232.49 8658.42,5262.49 8533.42,5272.49 8626.87,5287.32 8693.46,5287.32 8663.42,5322.49 8728.42,5322.49 8698.42,5352.49 9740.13,5393.36 10015.79,5394.32 9829.65,5397.49 9884.57,5397.17 9968.81,5396.86 9786.48,5398.44 10054.73,5399.82 9273.42,5407.49 9866.16,5416.86 10580.29,5419.4 10035.26,5420.14 9989.3,5421.6 9760.13,5425.75 9243.42,5432.49 9819.18,5435.59 10013.42,5442.49 10558.38,5442.25 10604.1,5449.87 9213.42,5462.49 9385.8,5464.3 10526.95,5466.06 10574.11,5476.38 9188.42,5487.49 9355.52,5494.58 10549.14,5500.08 10605.05,5503.21 9322.8,5527.3 10578.38,5533.68 9288.42,5557.49 9263.42,5587.49 10397.79,5589.28 10375.49,5615.24 10416.09,5617.07 8738.42,5632.49 8773.42,5667.49 8803.42,5692.49 9573.42,5702.49 8833.42,5722.49 10283.42,5727.49 9543.42,5732.49 9503.42,5767.49 10268.42,5772.49 9468.42,5797.49 10268.42,5817.49 9433.42,5832.49 9998.42,5857.49 10183.42,5882.49 10143.42,5902.49 10093.42,5917.49 10038.42,5937.49
ISEN_A: R35.2 U1.6 U12.7 | length 752
  Top Layer w10: U12.7 9073.42,4582.49 9032.45,4623.46 R35.2 8993.42,4735.54 8993.42,4857.49 9233.42,5097.49 9255.59,5097.49 U1.6
ISEN_B: R31.2 U1.7 U12.1 | length 1360.7
  Top Layer w8: U12.1 9048.42,4310.99 9048.42,4292.49 9058.42,4282.49 9083.42,4282.49 9098.42,4297.49 9098.42,4467.49 9083.42,4482.49 9017.64,4482.49 8973.42,4526.7 8973.42,4861.36 9239.55,5127.49 9296.3,5127.49 U1.7
  Top Layer w10: R31.2 9013.42,4287.49 9023.42,4297.49 U12.1
ISEN_C: R24.2 U1.8 U11.7 | length 1316.4
  Top Layer w8: R24.2 8513.76,4862.49 v1(8923.42,4862.49) ; v1(8988.42,4907.49) 8988.42,4918.8 9245.7,5176.08 9318.42,5176.08 U1.8
  Top Layer w15: R24.2 8498.76,4727.49 8543.42,4727.49 8558.42,4712.49 U11.7
  Bottom Layer w10: v1(8923.42,4862.49) 8943.42,4862.49 v1(8988.42,4907.49)
OUT_A: C16.1 CN1.1 Q1.1 Q1.2 Q1.3 Q2.5 Q2.6 Q2.7 Q2.8 Q2.9 U7.6 | length 1797.8
  Bottom Layer w15: U7.6 10713.42,4547.49 10738.42,4572.49 10738.42,4637.49 10713.42,4662.49 10713.42,5031.62 v1(10703.37,5041.68) ; v1(10743.35,5041.68) 10773.42,5011.6 C16.1
  Bottom Layer w50: 9893.42,5742.49 9893.42,5717.49 v1(9908.42,5702.49)
  Bottom Layer w70: v1(9908.42,5702.49) 10208.42,5702.49 10683.42,5227.49 10683.42,5077.49
  other v1: 10623.41,5041.68 10663.39,5041.68 10623.41,5076.68 10663.39,5076.68 10703.37,5076.68 10743.35,5076.68 10623.41,5111.68 10663.39,5111.68 10703.37,5111.68 10743.35,5111.68 9873.42,5702.14 9873.42,5736.03 9908.49,5736.03 9873.42,5767.49 9905.8,5767.49
OUT_B: C12.1 CN1.2 Q3.1 Q3.2 Q3.3 Q4.5 Q4.6 Q4.7 Q4.8 Q4.9 U5.6 | length 1425.9
  Bottom Layer w15: U5.6 U5.6@10503.42,4852.49 ; v1(10518.35,5041.68) 10538.42,5021.6 10538.42,4887.49 U5.6@10503.42,4852.49 ; C12.1 10547.79,4852.49 U5.6@10503.42,4852.49
  Bottom Layer w50: v1(9778.42,5697.49) v1(9778.42,5727.49) 9778.42,5742.49
  Bottom Layer w70: v1(9778.42,5697.49) 9778.42,5682.49 9854.08,5606.83 10119.08,5606.83 10458.42,5267.49 10458.42,5072.49
  other v1: 10398.41,5041.68 10438.39,5041.68 10478.37,5041.68 10398.41,5076.68 10438.39,5076.68 10478.37,5076.68 10518.35,5076.68 10398.41,5111.68 10438.39,5111.68 10478.37,5111.68 10518.35,5111.68 9748.42,5697.49 9808.42,5697.49 9748.42,5727.49 9808.42,5727.49 9748.42,5757.49 9778.42,5757.49 9808.42,5757.49
OUT_C: C14.1 CN1.3 Q5.1 Q5.2 Q5.3 Q6.5 Q6.6 Q6.7 Q6.8 Q6.9 U6.6 | length 1431.1
  Top Layer w15: C14.1@9920.86,4917.49 9920.86,4934.93 9953.4,4967.46 Q6.5
  Bottom Layer w15: U6.6 10123.45,4997.49 v1(10168.45,5042.49)
  Bottom Layer w70: 9658.42,5742.49 9658.42,5667.49 9816.42,5509.49 10041.42,5509.49 10228.42,5322.49 10228.42,5077.49
  other v1: 10208.43,5042.49 10248.41,5042.49 10288.4,5042.49 10168.45,5077.49 10208.43,5077.49 10248.41,5077.49 10288.4,5077.49 10168.45,5112.49 10208.43,5112.49 10248.41,5112.49 10288.4,5112.49 9643.42,5702.49 9683.42,5702.49 9642.85,5735.15 9683.42,5735.15 9643.19,5765.74 9683.42,5765.74
PWM1: U1.10 U7.2 | length 1499.6
  Top Layer w8: U1.10 9473.42,5162.5 9473.42,5067.49 9573.42,4967.49 9723.42,4967.49 9873.42,4817.49 9883.42,4817.49
  Top Layer w10: 9883.42,4817.49 v1(9898.42,4817.49)
  Inner3 w10: v1(9898.42,4817.49) 9868.42,4787.49 9868.42,4692.49 v1(9958.42,4602.49)
  Bottom Layer w8: v1(9958.42,4602.49) 10243.42,4602.49 10348.42,4497.49 U7.2
PWM2: U1.11 U5.2 | length 1137.5
  Top Layer w8: U1.11 9493.42,5213.21 9493.42,5082.49 9583.42,4992.49 9728.42,4992.49 9878.42,4842.49 v1(9928.42,4842.49)
  Bottom Layer w8: v1(9928.42,4842.49) 10028.42,4842.49 10148.42,4722.49 10173.42,4722.49 10188.42,4737.49 10188.42,4777.49 10213.42,4802.49 U5.2
PWM3: U1.12 U6.2 | length 678.2
  Top Layer w8: U1.12 9544.86,5232.49 v1(9558.42,5232.49)
  Bottom Layer w8: v1(9558.42,5232.49) 9623.42,5232.49 9743.42,5112.49 9873.42,5112.49 9918.42,5067.49 9918.42,4982.49 9883.42,4947.49 U6.2
RST: C37.2 R18.1 SW2.2 U1.3 | length 985.6
  Top Layer w8: U1.3 9243.37,4897.57 R18.1 9281.6,4925.48 9435.43,4925.48 v1(9443.42,4917.49)
  Bottom Layer w8: v1(9443.42,4917.49) 9433.42,4917.49 9426.43,4924.48 9426.43,5245.49 9557.6,5376.66 SW2.2
  Bottom Layer w15: v1(9443.42,4917.49) 9458.42,4902.49 C37.2
RX0: CN2.2 U1.34 | length 1864.9
  Top Layer w8: v1(8708.42,5572.49) 8709.88,5572.49 U1.34
  Bottom Layer w8: v1(8708.42,5572.49) 8663.42,5527.49 8663.42,5442.49 8758.42,5347.49 8808.42,5347.49 8863.42,5292.49 8863.42,5007.49 8938.42,4932.49 9028.42,4932.49 9063.42,4897.49 9063.42,4487.49 9150.42,4400.49 9150.42,4384.48 9073.42,4307.49 9073.42,4207.49 9108.42,4172.49 9120.59,4172.49 CN2.2
RX1: U1.28 U10.4 | length 2244.1
  Top Layer w10: U1.28 8975.01,5740.9 v1(9043.42,5672.49)
  Bottom Layer w10: v1(9043.42,5672.49) 9123.42,5672.49 9388.42,5407.49 9388.42,4067.49 9333.42,4012.49 9333.42,3902.49 9368.42,3867.49 9417.69,3867.49 U10.4
SA_A+: C44.1 Q2.1 Q2.2 Q2.3 R5.2 R33.1 | length 3678.2
  Top Layer w8: v1(8993.42,5112.49) 8913.42,5192.49 8913.42,5347.49 9113.42,5547.49 9113.42,5797.49 9203.42,5887.49 9308.42,5887.49 9678.42,5517.49 9768.42,5517.49 9893.42,5642.49 10513.42,5642.49 10634.72,5521.19 R5.2 ; C44.1 9343.42,4504.93 v1(9343.42,4587.49)
  Top Layer w25: R33.1 9306.32,4467.83 C44.1
  Bottom Layer w8: v1(8993.42,5112.49) 9268.42,4837.49 9303.42,4837.49 9341.89,4799.02 9341.89,4589.02 v1(9343.42,4587.49)
SA_B+: C43.1 Q4.1 Q4.2 Q4.3 R8.2 R29.1 | length 2884.9
  Top Layer w8: v1(8958.42,4972.49) 8966.53,4972.49 9410.66,5416.61 9704.79,5416.61 9897.77,5609.59 9966.27,5609.59 10170.59,5405.27 10219.31,5405.27 R8.2@10285.92,5338.67 ; v1(9178.42,4422.49) 9208.42,4422.49 9218.42,4432.49 9303.42,4432.49 9308.42,4427.49 C43.1
  Top Layer w25: R29.1 9306.32,4397.15 C43.1
  Bottom Layer w8: v1(8958.42,4972.49) 9068.42,4972.49 9163.42,4877.49 9163.42,4857.8 9158.11,4852.49 9133.42,4852.49 9128.42,4847.49 9128.42,4837.49 9133.42,4832.49 9158.42,4832.49 9163.42,4827.49 9163.42,4816 9159.91,4812.49 9133.42,4812.49 9128.42,4807.49 9128.42,4797.49 9133.42,4792.49 9158.42,4792.49 9163.42,4787.49 9163.42,4778.12 9157.79,4772.49 9133.99,4772.49 9128.99,4767.49 9128.99,4757.49 9133.99,4752.49 9158.42,4752.49 9163.42,4747.49 9163.42,4687.49 9253.42,4597.49 9253.42,4497.49 v1(9178.42,4422.49)
SA_C+: C42.1 Q6.1 Q6.2 Q6.3 R11.2 R26.1 | length 1864.2
  Top Layer w8: C42.1 8885.86,4584.93 8958.42,4657.49 8958.42,4931.03 9425.74,5398.35 9571.45,5398.35 9602.31,5367.49 10073.42,5367.49 R11.2
  Top Layer w25: R26.1 8780.52,4584.93 C42.1
SCL: R19.1 U1.36 U9.7 | length 1222.7
  Top Layer w10: U1.36 8687.86,5458.05 v1(8738.42,5407.49) ; v1(9283.42,4947.49) v1(9518.42,4947.49) 9598.42,4867.49 U9.7
  Bottom Layer w10: v1(8738.42,5407.49) 8823.42,5407.49 v1(9283.42,4947.49) ; R19.1 9507.74,4958.17 v1(9518.42,4947.49)
SDA: R20.1 U1.33 U9.6 | length 1293.3
  Top Layer w10: U1.33 8788.96,5561.95 v1(8853.42,5497.49) ; v1(9303.42,4972.49) 9318.42,4987.49 9514.92,4987.49 9559.92,4942.49 v1(9598.42,4942.49) 9648.42,4892.49 U9.6
  Bottom Layer w10: v1(8853.42,5497.49) 8853.42,5422.49 v1(9303.42,4972.49) ; v1(9598.42,4942.49) 9643.76,4942.49 R20.1
TEMP: RT.1 U1.13 U14.1 | length 1256.7
  Top Layer w15: U1.13 9545.4,5310.51 9598.42,5257.49 9668.42,5257.49 9778.76,5147.15 RT.1 v1(9818.42,5197.49) ; U14.1 10103.74,5772.8 v1(10113.42,5782.49)
  Inner1 w15: v1(9818.42,5197.49) 9973.42,5352.49 10068.42,5352.49 10138.42,5422.49 10138.42,5757.49 v1(10113.42,5782.49)
TR: U1.14 U10.5 | length 1574.5
  Top Layer w10: v1(9458.42,5367.49) 9551.28,5367.49 U1.14
  Bottom Layer w10: U10.5 9408.42,3957.11 9408.42,5317.49 v1(9458.42,5367.49)
TX0: CN2.1 U1.35 | length 1555.2
  Top Layer w8: U1.35 8813.42,5398.23 v1(8813.42,5372.49)
  Bottom Layer w8: v1(8813.42,5372.49) 8883.42,5302.49 8883.42,5007.49 8940.43,4950.48 9030.43,4950.48 9083.42,4897.49 9083.42,4486.38 9207.37,4362.44 9207.37,4314.94 CN2.1
TX1: U1.30 U10.3 | length 2360.6
  Top Layer w10: U1.30 8957.73,5607.49 v1(9008.42,5607.49)
  Bottom Layer w10: v1(9008.42,5607.49) 9143.42,5607.49 9368.42,5382.49 9368.42,4117.49 9293.42,4042.49 9293.42,3882.49 9343.42,3832.49 9453.4,3832.49 U10.3
VIN: C2.2 C3.2 C18.2 C19.2 U2.7 U8.7 U13.1 | length 1109.2
  Top Layer w25: U2.7 9633.7,3697.49 9673.07,3736.86 C2.2 ; 9863.42,3987.03 9928.42,3922.03 C18.2 ; C19.2 10013.42,3912.13 U8.7
  Top Layer w35: C2.2 9797.16,3736.86 C3.2 9863.42,3803.12 9863.42,3987.03 9863.42,4107.49 9992.35,4236.41 U13.1 ; C18.2 C19.2
pads on no net: CN1.4 CN1.5 CN2.5 CN2.6 U1.4 U1.5 U1.16 U1.17 U1.18 U1.19 U1.20 U1.21 U1.22 U1.26 U1.27 U1.29 U1.31 U1.32 U1.37 U2.2 U2.3 U2.5 U8.2 U8.3 U8.5 U9.3 U9.5 U10.9 U14.3 U14.4

## Polygon pours and split planes (outlines as drawn)
OUT_C on Bottom Layer (solid, remove dead copper, pour order 2): 10144.15,5022.49 10318.42,5022.49 10318.42,5137.34 10144.15,5137.34
OUT_B on Bottom Layer (solid, remove dead copper, pour order 4): 10373.42,5022.49 10548.42,5022.49 10548.42,5137.49 10373.42,5137.49
OUT_A on Bottom Layer (solid, remove dead copper, pour order 6): 10598.42,5022.49 10768.42,5022.49 10768.42,5137.49 10598.42,5137.49
GND on Bottom Layer (solid, remove dead copper, pour order 8): 3000,3000 6515,3000 6515,5980 3000,5980
GND on Top Layer (solid, remove dead copper, pour order 8): 7815.19,3118.2 11275.19,3118.2 11275.19,6433.2 7815.19,6433.2
GND on Inner4 (solid, remove dead copper): 8018.42,3302.49 11193.42,3302.49 11193.42,6177.49 8018.42,6177.49
GND on Inner3 (solid, remove dead copper): 8038.42,3322.49 11018.42,3322.49 11018.42,6047.49 8038.42,6047.49
GND on Inner2 (solid, remove dead copper): 8228.42,3357.49 11228.42,3357.49 11228.42,6262.49 8228.42,6262.49
GND on Inner1 (solid, remove dead copper): 8078.42,3297.49 11073.42,3297.49 11073.42,6352.49 8078.42,6352.49

## Keep-outs
Top Layer:
  circle w10: c9249.41,4747.49 r98.43
  circle w10: c9623.42,5121.5 r98.43
  circle w10: c9997.44,4747.49 r98.43
  circle w10: c9623.42,4373.47 r98.43
  region: 9352.63,3879.57 9634.22,3879.57 9634.22,4145.41 9352.63,4145.41
  region: 10323.99,4071.03 10511.97,3883.05 10312.86,3683.94 10124.88,3871.92
Bottom Layer:
  region: 9352.63,3879.57 9634.22,3879.57 9634.22,4145.41 9352.63,4145.41
  region: 10323.99,4071.03 10511.97,3883.05 10313.42,3684.51 10313.42,3682.49 10124.88,3871.03 10124.88,3871.92
  region: 10112.06,3924.43 10543.56,4355.93 10398.8,4500.69 9967.29,4069.19
Board Outline Layer:
  circle w10: c9623.42,4747.49 r1299.21
Multi-Layer:
  circle w10: c9623.42,5121.5 r53.15
  circle w10: c9997.44,4747.49 r53.15
  circle w10: c9623.42,4373.47 r53.15
  circle w10: c9249.41,4747.49 r53.15
  circle w10: c10343.42,5737.49 r19.68
  circle w10: c9683.42,3547.49 r19.68
  circle w10: c8493.42,5232.49 r19.68

## Other copper
Top Layer:
  region net 5V: 8933.42,4002.49 9263.42,4002.49 9263.42,4127.49 8933.42,4127.49
  region net 12V: 10143.42,4627.49 10768.42,4627.49 10768.42,4817.49 10143.42,4817.49
  region net 3V3: 8388.42,4402.49 8458.42,4402.49 8458.42,4537.49 8388.42,4537.49
  region: 9588.19,5866.47 9969.16,5866.47 9969.16,5984.49 9588.19,5984.49
  region net 5V: 9263.42,4002.49 9325.65,3940.26 9418.42,3940.26 9418.42,4082.49 9323.42,4082.49 9278.42,4127.49 9263.42,4127.49
  region net $1N722: 9568.42,4082.49 9568.42,3882.49 9533.42,3847.49 9508.42,3847.49 9508.42,3807.49 9541.56,3807.49 9579.13,3769.91 9579.13,3735.09 9633.42,3735.09 9633.42,3786.9 9656.68,3810.16 9775.47,3810.16 9775.47,3881.62 9684.29,3881.62 9663.28,3902.63 9663.28,4084.03 9569.97,4084.03
  region net $2N447: 10068.42,3907.49 10093.42,3882.49 10098.33,3877.49 10118.42,3847.49 10143.42,3807.49 10248.42,3702.49 10318.42,3772.49 10213.42,3877.49 10117.92,3928.85 10101.42,3945.35 10068.56,3912.49
  region net 12V: 10553.42,4392.49 10553.42,4353.37 10378.42,4178.37 10378.42,4175.13 10423.42,4130.13 10423.42,4127.49 10586.39,4290.45 10586.39,4345.45 10628.36,4387.42 10588.58,4427.2 10553.86,4392.49
  region net 12V: 10423.42,4082.49 10388.42,4047.49 10488.42,3947.49 10553.42,4028.51 10553.42,4147.49 10698.42,4322.49 10633.07,4387.84 10629.82,4390.62 10588.42,4427.36 10588.42,4427.49 10395.92,4234.99 10425.04,4205.87
  region net OUT_A: 10596.57,4947.94 10645.74,4947.94 10645.74,4858.25 10770.19,4858.25 10770.19,4980.12 10596.83,4980.12 10596.83,4948.2
  region net OUT_B: 10371.57,4946.53 10420.74,4946.53 10420.74,4856.85 10545.19,4856.85 10545.19,4978.71 10371.83,4978.71 10371.83,4946.79
  region net OUT_C: 10141.57,4946.53 10190.74,4946.53 10190.74,4856.85 10315.19,4856.85 10315.19,4978.71 10141.83,4978.71 10141.83,4946.79
  region net SA_C+: 10317.77,5178.09 10194.15,5178.09 10194.15,5217.46 10068.42,5343.18 10068.42,5347.49 10123.42,5402.49 10128.42,5402.49 10193.42,5337.49 10198.42,5337.49 10317.77,5218.14
  region net SA_B+: 10543.42,5177.49 10420.96,5177.49 10420.96,5259.95 10313.42,5367.49 10372.87,5426.93 10437.31,5362.49 10443.42,5362.49 10545.19,5260.72 10545.19,5179.25
  region net SA_A+: 10648.42,5177.49 10648.42,5272.49 10578.42,5342.49 10578.42,5362.49 10643.42,5427.49 10648.42,5427.49 10770.19,5305.72 10770.19,5178.25 10769.42,5177.49
  region net OUT_C: 9713.96,5842.34 9653.42,5787.49 9623.42,5787.49 9623.42,5682.82 9701.78,5682.82 9701.78,5745.85 9744.93,5779.06 9744.88,5841.95 9729.94,5842
  region net OUT_A: 9842.54,5842.04 9904.25,5787.44 9933.42,5787.44 9933.42,5684.57 9853.87,5684.57 9853.32,5749.29 9812.15,5779.26 9812.11,5841.92 9822.64,5841.92
  region net OUT_B: 9763.42,5842.49 9763.42,5780.09 9723.42,5747.49 9723.42,5682.49 9832.33,5682.49 9832.33,5748.58 9793.42,5780.09 9793.42,5842.49
  region net 12V: 10616.15,4632.49 10616.15,4455.22 10588.42,4427.49 10698.42,4322.49 10768.42,4392.49 10768.42,4632.49
  region net 12V: 10395.92,4234.99 10353.42,4192.49 10418.42,4127.49 10428.42,4127.49 10463.42,4162.49 10463.42,4167.49
  region net 12V: 9833.36,4471.17 9769.68,4407.49 9798.39,4378.77 9862.1,4442.49 9863.42,4442.49 9834.74,4471.17
  region net $1N1371: 9354.54,3601.49 9354.54,3593.49 cw(c9354.54,3578.49) 9366.54,3587.49 9366.54,3607.49 cw(c9354.54,3616.49)
  region net $1N1371: 9309.08,3635.38 9317.08,3635.38 9317.11,3636.07 9317.2,3636.71 9317.33,3637.32 9317.51,3637.89 9317.74,3638.44 9318.01,3638.96 9318.31,3639.46 9318.65,3639.94 9319.41,3640.88 9321.62,3643.27 9322.09,3643.79 9304.08,3643.79 9306.35,3641.34 9307.15,3640.41 9307.52,3639.94 9307.86,3639.46 9308.16,3638.96 9308.43,3638.44 9308.65,3637.89 9308.84,3637.32 9308.97,3636.71 9309.06,3636.07
  region net $1N650: 9404.63,3781.19 9379.63,3781.19 cw(c9354.77,3781.19) 9366.54,3759.3 9417.72,3759.3 cw(c9429.48,3781.19)
  region net $1N650: 9438.42,3839.99 9438.42,3814.99 cw(c9438.42,3760.83) 9455.12,3812.35 9455.12,3842.62 cw(c9438.42,3894.14)
Bottom Layer:
  region net OUT_C: 9623.42,5682.82 9701.78,5682.82 9701.78,5787.49 9623.42,5787.49
  region net OUT_B: 9723.42,5682.49 9832.33,5682.49 9832.33,5787.49 9723.42,5787.49
  region net OUT_A: 9853.42,5684.57 9933.42,5684.57 9933.42,5787.49 9853.42,5787.49
  region net 12V: 9858.42,4697.49 9898.42,4697.49 9898.42,4747.49 9858.42,4747.49
  region net 5V: 8897.76,4057.49 9043.42,4057.49 9043.42,4147.49 8897.76,4147.49
  region net 3V3: 8388.42,4402.49 8431.13,4402.49 8431.13,4537.49 8388.42,4537.49
  region net OUT_C: 10144.15,5137.34 10203.26,5187.27 10253.44,5187.27 10317.77,5137.34
  region net OUT_B: 10373.42,5137.49 10432.08,5185.9 10482.74,5185.9 10548.42,5137.49
  region net OUT_A: 10598.42,5137.49 10659.78,5185.32 10709.77,5185.32 10768.42,5137.49
  region net 12V: 10418.42,4207.49 10063.42,3852.49 10153.42,3762.49 10508.42,4117.49
  region net 12V: 10471.52,3990.58 10553.42,4072.49 10468.42,4157.49 10463.42,4157.49 10397.1,4091.17 10382.39,4083.2
  region net $1N1371: 9317.08,3668.08 9309.08,3668.08 9309.06,3667.39 9308.97,3666.75 9308.84,3666.14 9308.65,3665.57 9308.43,3665.02 9308.16,3664.51 9307.86,3664.01 9307.52,3663.52 9306.76,3662.58 9304.55,3660.19 9304.08,3659.67 9322.09,3659.67 9319.82,3662.12 9319.01,3663.05 9318.65,3663.52 9318.31,3664.01 9318.01,3664.51 9317.74,3665.02 9317.51,3665.57 9317.33,3666.14 9317.2,3666.75 9317.11,3667.39
  region net $1N1371: 9309.08,3635.38 9317.08,3635.38 9317.11,3636.07 9317.2,3636.71 9317.33,3637.32 9317.51,3637.89 9317.74,3638.44 9318.01,3638.96 9318.31,3639.46 9318.65,3639.94 9319.41,3640.88 9321.62,3643.27 9322.09,3643.79 9304.08,3643.79 9306.35,3641.34 9307.15,3640.41 9307.52,3639.94 9307.86,3639.46 9308.16,3638.96 9308.43,3638.44 9308.65,3637.89 9308.84,3637.32 9308.97,3636.71 9309.06,3636.07
  region net $2N452: 10097.16,4198.1 10102.81,4203.75 10102.35,4204.26 10101.95,4204.78 10101.62,4205.3 10101.34,4205.83 10101.12,4206.38 10100.94,4206.94 10100.8,4207.5 10100.7,4208.08 10100.57,4209.28 10100.45,4212.54 10100.41,4213.24 10087.67,4200.5 10091.01,4200.38 10092.23,4200.29 10092.83,4200.21 10093.41,4200.11 10093.97,4199.97 10094.53,4199.79 10095.08,4199.57 10095.61,4199.29 10096.13,4198.96 10096.65,4198.56

## Silkscreen, mask and mechanical layers (free items; w line width, h text height)
Top Silkscreen Layer:
  text "By Chang /  LAB 121, V2.0" at 8898.42,3687.49 h60
Mechanical Layer:
  circle w1: c9623.42,5121.5 r53.15
  circle w1: c9997.44,4747.49 r53.15
  circle w1: c9623.42,4373.47 r53.15
  circle w1: c9249.41,4747.49 r53.15
  circle w1: c10343.42,5737.49 r19.68
  circle w1: c9683.42,3547.49 r19.68
  circle w1: c8493.42,5232.49 r19.68

## Text inside footprints (layer, text, board x,y; h text height)
U10: Bottom Silkscreen Layer "CAN TO TTL" at 9595.53,3918.83 h39.65 r270